# EAGLE board xio4 (EAGLE 9.4.2)
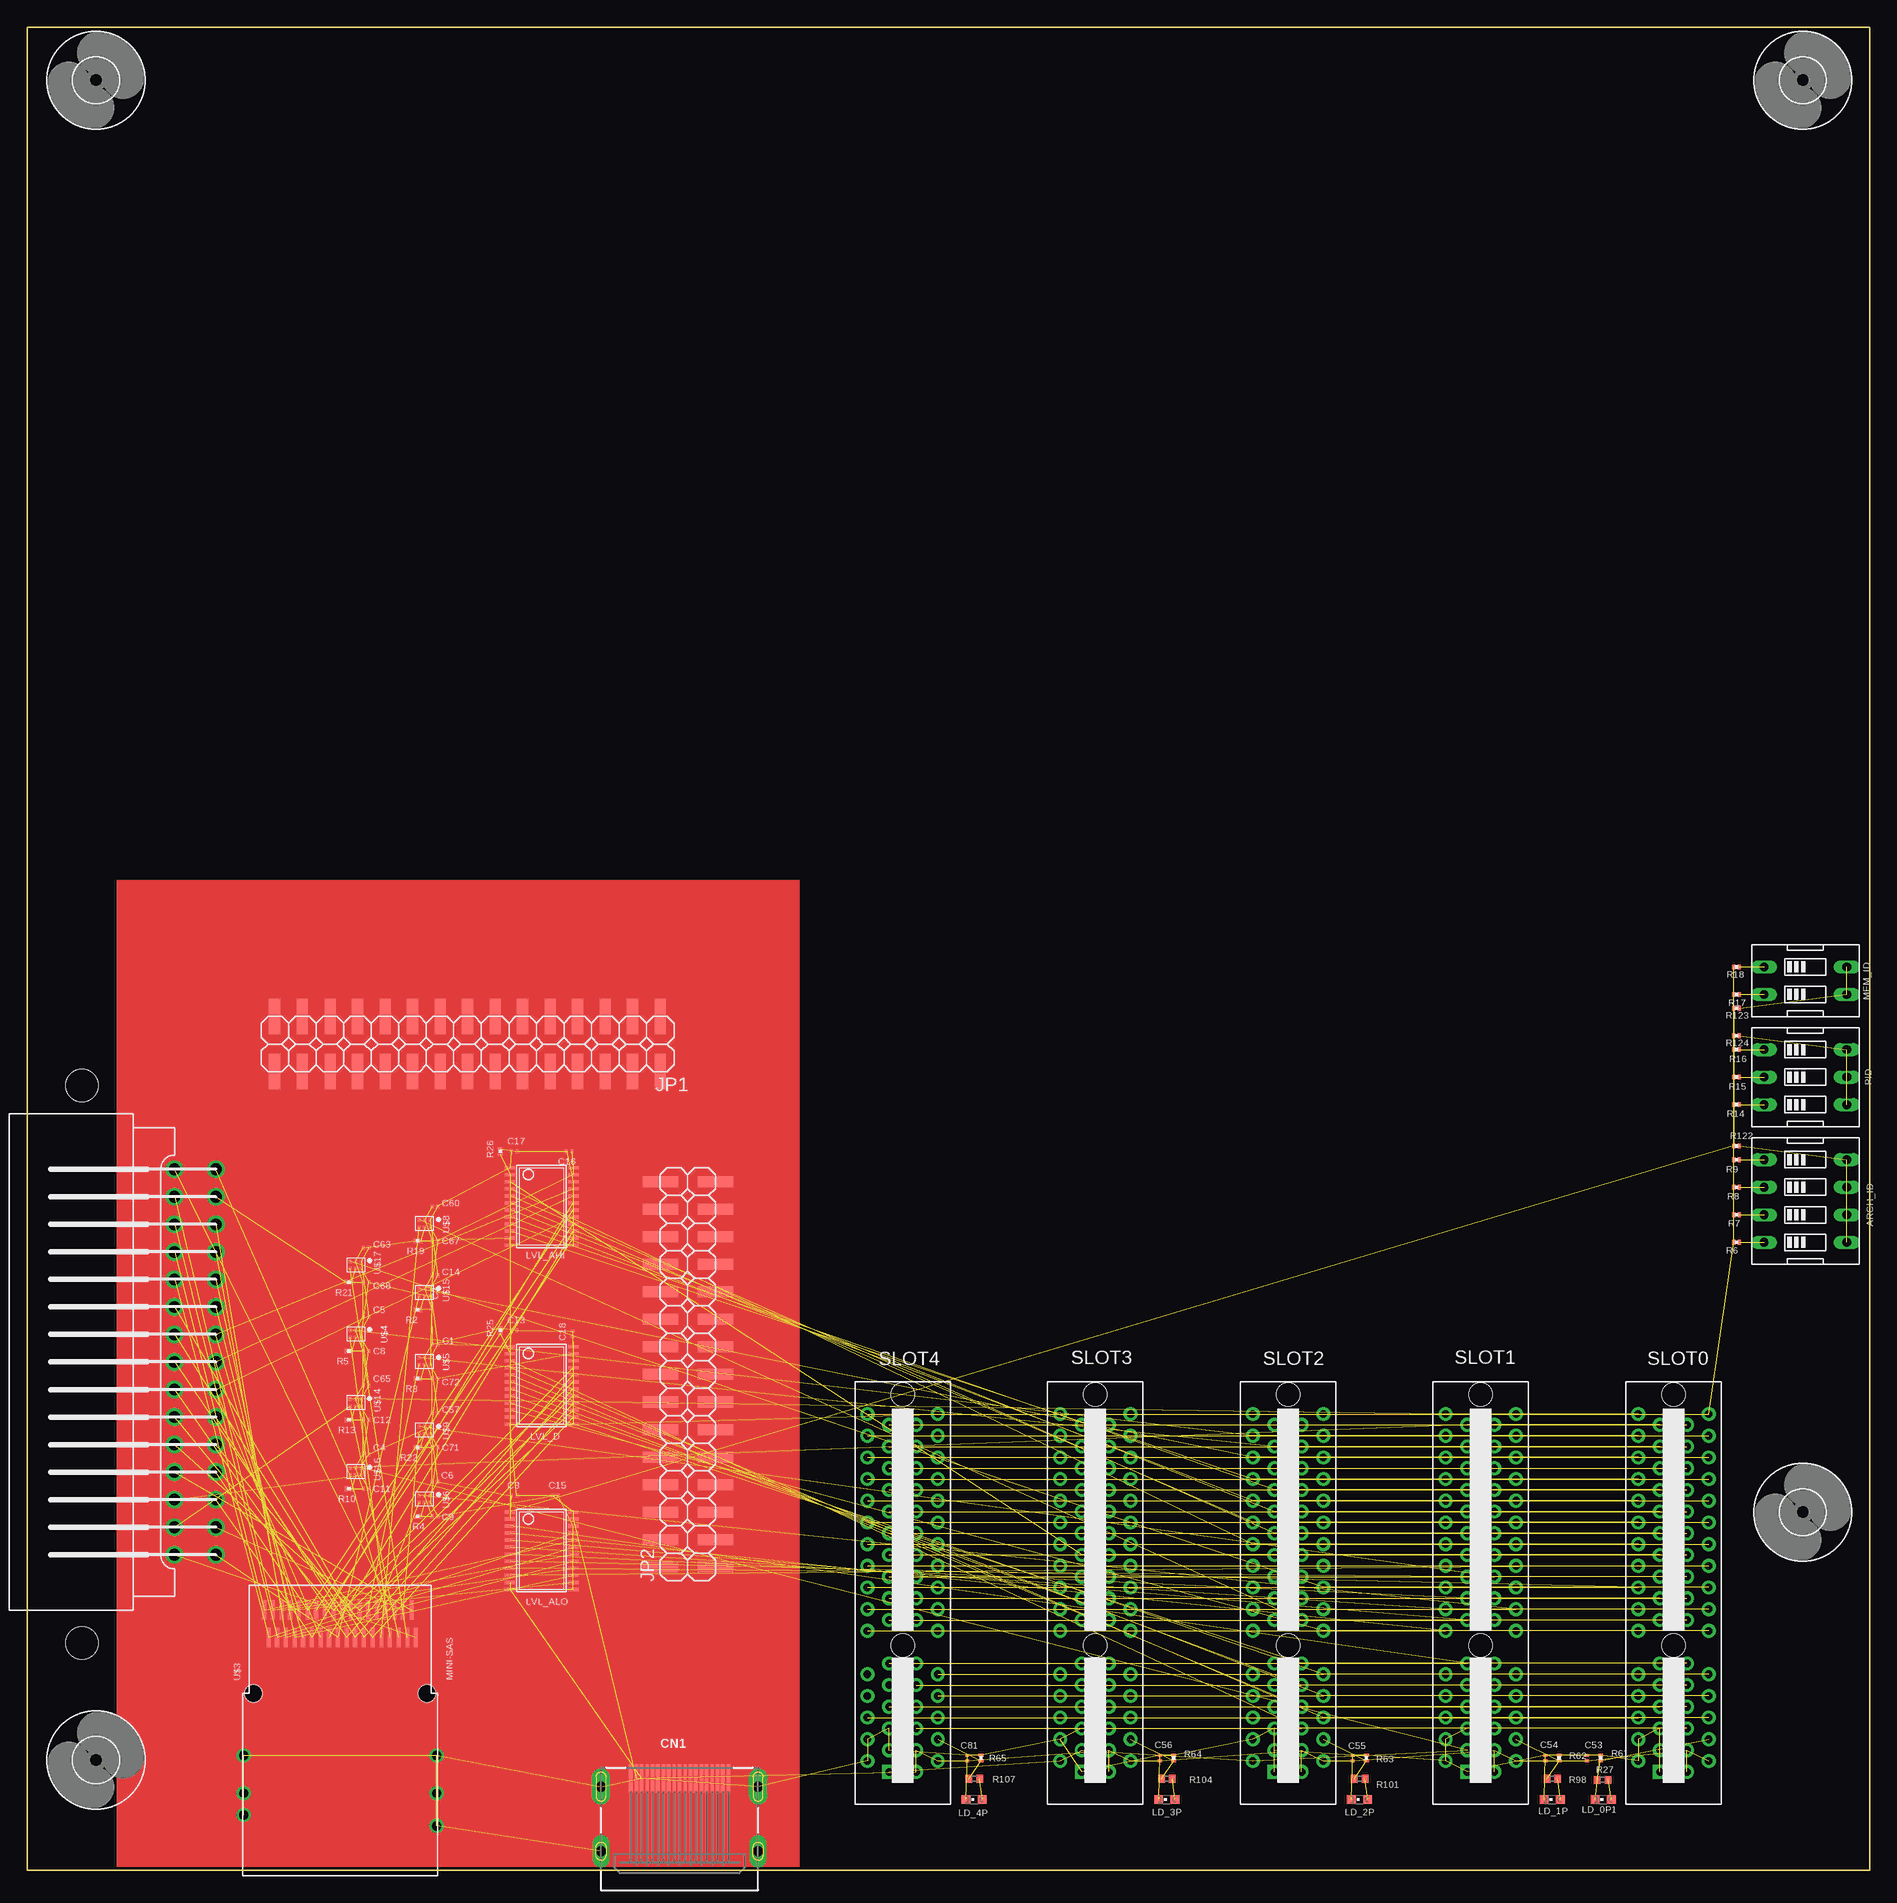
[diagram p0: board, top side]
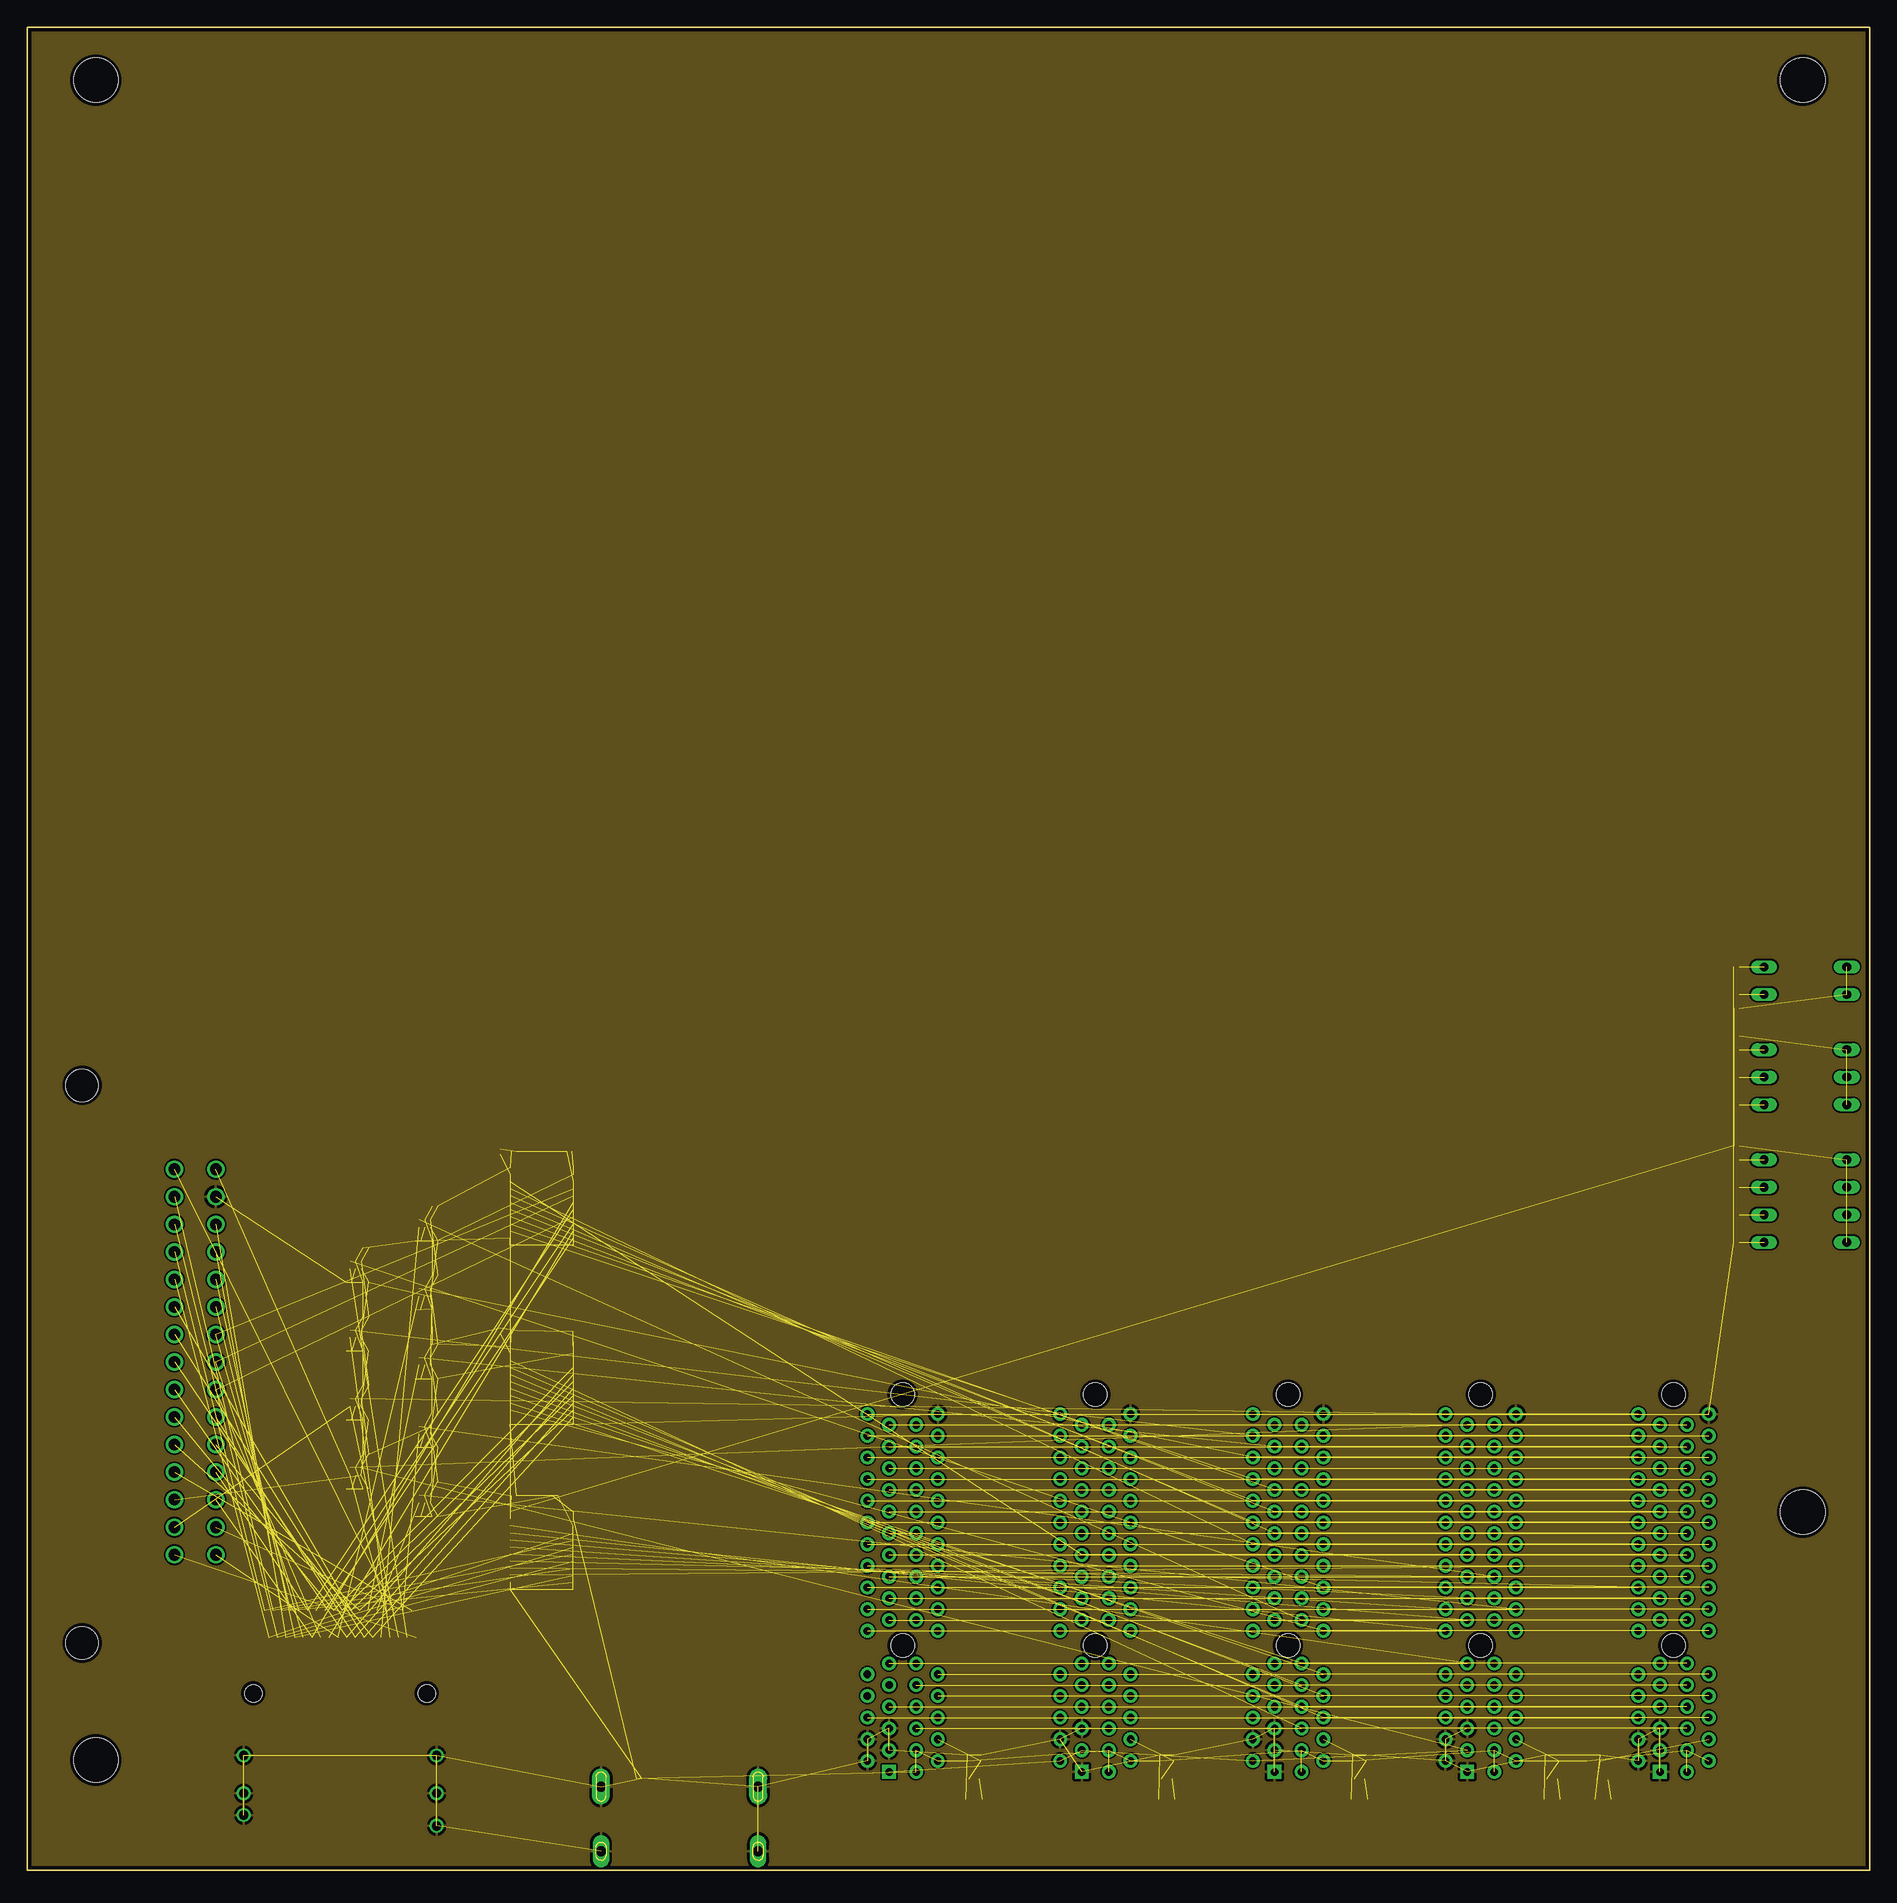
[diagram p1: board, inner layer Route15]

Size 170 x 170 mm. Coordinates in mm from the lower left corner, seen from the top.
Outline: 0,170 170,170 170,0 0,0 0,170
Copper layers (1+2*15+16): Top 0.035mm / dielectric 0.2mm / Route2 0.017mm / dielectric 1.2mm / Route15 0.017mm / dielectric 0.2mm / Bottom 0.035mm
Design rules "seed-4layer-6.6": minimum track width 6mil, minimum drill 0.3mm, track to track 6mil, track to pad 6mil, pad to pad 6mil, via to via 6mil, smd to smd 0mil, copper to edge 12mil, drill to drill 12mil, minimum pad ring 6mil, minimum via ring 5.5mil, stop-mask expansion 4mil, vias tented up to drill 25mil, thermal gap 10mil
Net classes: 1 Power: width 0.305 mm, drill 0.203 mm; 2 Slot-power: width 0.508 mm; 3 tx100: width 0.254 mm, clearance 0.457 mm; 4 usb90: width 0.254 mm, clearance 0.178 mm; 5 cclk50: width 0.203 mm; 6 3v3: width 0.254 mm; 7 vccint_aux: width 0.305 mm; 14 qspi: width 0.203 mm
Holes 3 mm at 5.08,20.95 5.08,72.39

## Footprints (pad centres in the part's own frame; a part is rotated, then mirrored left to right if it is on the bottom)
EDG-04 = drill 0.813 long: 1 -3.81,-3.81; 2 -1.27,-3.81; 3 1.27,-3.81; 4 3.81,-3.81; 5 3.81,3.81; 6 1.27,3.81; 7 -1.27,3.81; 8 -3.81,3.81
C0201 = smd 0.25 x 0.35: 1 -0.25,0; 2 0.25,0
A8_CART = drill 1.067: P1 -17.78,6.35; P2 -15.24,6.35; P3 -12.7,6.35; P4 -10.16,6.35; P5 -7.62,6.35; P6 -5.08,6.35; P7 -2.54,6.35; P8 0,6.35; P9 2.54,6.35; P10 5.08,6.35; P11 7.62,6.35; P12 10.16,6.35; P13 12.7,6.35; P14 15.24,6.35; P15 17.78,6.35; PA -17.78,10.16; PB -15.24,10.16; PC -12.7,10.16; PD -10.16,10.16; PE -7.62,10.16; PF -5.08,10.16; PH -2.54,10.16; PJ 0,10.16; PK 2.54,10.16; PL 5.08,10.16; PM 7.62,10.16; PN 10.16,10.16; PP 12.7,10.16; PR 15.24,10.16; PS 17.78,10.16
HDMI_MOLEX_47151-0001 = smd 0.3 x 2.6: 1 4.5,0; 2 4,0; 3 3.5,0; 4 3,0; 5 2.5,0; 6 2,0; 7 1.5,0; 8 1,0; 9 0.5,0; 10 0,0; 11 -0.5,0; 12 -1,0; 13 -1.5,0; 14 -2,0; 15 -2.5,0; 16 -3,0; 17 -3.5,0; 18 -4,0; 19 -4.5,0 | drill 0.9 pad 1.65 long: P$1 -7.25,-0.76; P$2 7.25,-0.76 | drill 0.9 pad 1.5 long: P$3 7.25,-6.72; P$4 -7.25,-6.72
4,1 = hole 4.1: 0,0
2X15SMD = smd 1.016 x 3.302: 1 -1.27,-3.81; 2 -1.27,1.27; 3 1.27,-3.81; 4 1.27,1.27; 5 3.81,-3.81; 6 3.81,1.27; 7 6.35,-3.81; 8 6.35,1.27; 9 8.89,-3.81; 10 8.89,1.27; 11 11.43,-3.81; 12 11.43,1.27; 13 13.97,-3.81; 14 13.97,1.27; 15 16.51,-3.81; 16 16.51,1.27; 17 19.05,-3.81; 18 19.05,1.27; 19 21.59,-3.81; 20 21.59,1.27; 21 24.13,-3.81; 22 24.13,1.27; 23 26.67,-3.81; 24 26.67,1.27; 25 29.21,-3.81; 26 29.21,1.27; 27 31.75,-3.81; 28 31.75,1.27; 29 34.29,-3.81; 30 34.29,1.27
CHIPLED_0603 = smd 0.8 x 0.8: A 0,-0.75; C 0,0.75
TSSOP24 = smd 0.305 x 0.991: 1 -3.575,-2.918; 2 -2.925,-2.918; 3 -2.275,-2.918; 4 -1.625,-2.918; 5 -0.975,-2.918; 6 -0.325,-2.918; 7 0.325,-2.918; 8 0.975,-2.918; 9 1.625,-2.918; 10 2.275,-2.918; 11 2.925,-2.918; 12 3.575,-2.918; 13 3.575,2.918; 14 2.925,2.918; 15 2.275,2.918; 16 1.625,2.918; 17 0.975,2.918; 18 0.325,2.918; 19 -0.325,2.918; 20 -0.975,2.918; 21 -1.625,2.918; 22 -2.275,2.918; 23 -2.925,2.918; 24 -3.575,2.918
EDG-02 = drill 0.813 long: 1 -1.27,-3.81; 2 1.27,-3.81; 3 1.27,3.81; 4 -1.27,3.81
EDG-03 = drill 0.813 long: 1 -2.54,-3.81; 2 0,-3.81; 3 2.54,-3.81; 4 2.54,3.81; 5 0,3.81; 6 -2.54,3.81
R0201 = smd 0.28 x 0.43: 1 -0.255,0; 2 0.255,0
R0402 = smd 0.6 x 0.7: 1 -0.5,0; 2 0.5,0
PCI-E_64 = drill 0.7 pad 1.27 square: A1 -12.06,1.5 | drill 0.7 pad 1.27: A2 -11.06,3.5; A3 -10.06,1.5; A4 -9.06,3.5; A5 -8.06,1.5; A6 -7.06,3.5; A7 -6.06,1.5; A8 -5.06,3.5; A9 -4.06,1.5; A10 -3.06,3.5; A11 -2.06,1.5; A12 0.94,3.5; A13 1.94,1.5; A14 2.94,3.5; A15 3.94,1.5; A16 4.94,3.5; A17 5.94,1.5; A18 6.94,3.5; A19 7.94,1.5; A20 8.94,3.5; A21 9.94,1.5; A22 10.94,3.5; A23 11.94,1.5; A24 12.94,3.5; A25 13.94,1.5; A26 14.94,3.5; A27 15.94,1.5; A28 16.94,3.5; A29 17.94,1.5; A30 18.94,3.5; A31 19.94,1.5; A32 20.94,3.5; B1 -12.06,-1; B2 -11.06,-3; B3 -10.06,-1; B4 -9.06,-3; B5 -8.06,-1; B6 -7.06,-3; B7 -6.06,-1; B8 -5.06,-3; B9 -4.06,-1; B10 -3.06,-3; B11 -2.06,-1; B12 0.94,-3; B13 1.94,-1; B14 2.94,-3; B15 3.94,-1; B16 4.94,-3; B17 5.94,-1; B18 6.94,-3; B19 7.94,-1; B20 8.94,-3; B21 9.94,-1; B22 10.94,-3; B23 11.94,-1; B24 12.94,-3; B25 13.94,-1; B26 14.94,-3; B27 15.94,-1; B28 16.94,-3; B29 17.94,-1; B30 18.94,-3; B31 19.94,-1; B32 20.94,-3 | hole 2.15: -0.41,0.25; 22.74,0.25
MINI-SAS = smd 0.35 x 1.8: PA1 -6.2,8.78; PA2 -5.4,8.78; PA3 -4.6,8.78; PA4 -3.8,8.78; PA5 -3,8.78; PA6 -2.2,8.78; PA7 -1.4,8.78; PA8 -0.6,8.78; PA9 0.2,8.78; PA10 1,8.78; PA11 1.8,8.78; PA12 2.6,8.78; PA13 3.4,8.78; PA14 4.2,8.78; PA15 5,8.78; PA16 5.8,8.78; PA17 6.6,8.78; PA18 7.4,8.78; PB1 -6.6,11.29; PB2 -5.8,11.29; PB3 -5,11.29; PB4 -4.2,11.29; PB5 -3.4,11.29; PB6 -2.6,11.29; PB7 -1.8,11.29; PB8 -1,11.29; PB9 -0.2,11.29; PB10 0.6,11.29; PB11 1.4,11.29; PB12 2.2,11.29; PB13 3,11.29; PB14 3.8,11.29; PB15 4.6,11.29; PB16 5.4,11.29; PB17 6.2,11.29; PB18 7,11.29 | drill 0.85: SHIELD1 -8.5,-2.12; SHIELD2 -8.5,-5.62; SHIELD3 -8.5,-7.62; SHIELD4 9.3,-2.12; SHIELD5 9.3,-5.62; SHIELD6 9.3,-8.62 | hole 1.6: -7.6,3.6; 8.4,3.6
SOT886 = smd 0.325 x 0.27: 1 -0.338,0.5; 2 -0.338,0; 3 -0.338,-0.5; 4 0.338,-0.5; 5 0.338,0; 6 0.338,0.5

## Placement (x,y rotation side)
ARCH_ID  209-4MS  [EDG-04]  164.07,61.72 270 top
C1  0.1uF  [C0201]  37.63,48.52 180 top
C2  0.1uF  [C0201]  37.31,52.01 270 top
C3  0.1uF  [C0201]  44.93,34.55 0 top
C4  0.1uF  [C0201]  31.28,38.36 180 top
C5  0.1uF  [C0201]  31.28,51.06 180 top
C6  0.1uF  [C0201]  37.63,35.82 180 top
C8  0.1uF  [C0201]  31.28,47.88 180 top
C9  0.1uF  [C0201]  37.63,32.65 180 top
C11  0.1uF  [C0201]  31.28,35.19 180 top
C12  0.1uF  [C0201]  31.28,41.53 180 top
C13  0.1uF  [C0201]  44.93,49.79 0 top
C14  0.1uF  [C0201]  37.63,54.87 180 top
C15  0.1uF  [C0201]  48.74,34.55 0 top
C16  0.1uF  [C0201]  50.01,66.3 180 top
C17  0.1uF  [C0201]  44.93,66.3 0 top
C18  0.1uF  [C0201]  50.33,49.47 90 top
C53  0.1uF  [C0201]  143.9,10.34 90 top
C54  0.1uF  [C0201]  140.09,10.34 90 top
C55  0.1uF  [C0201]  122.31,10.34 90 top
C56  0.1uF  [C0201]  104.53,10.34 90 top
C57  0.1uF  [C0201]  37.63,42.17 180 top
C60  0.1uF  [C0201]  37.63,61.22 180 top
C63  0.1uF  [C0201]  31.28,57.41 180 top
C65  0.1uF  [C0201]  31.28,44.71 180 top
C67  0.1uF  [C0201]  37.63,58.05 180 top
C68  0.1uF  [C0201]  31.28,54.23 180 top
C71  0.1uF  [C0201]  37.63,38.99 180 top
C72  0.1uF  [C0201]  37.63,45.34 180 top
C81  0.1uF  [C0201]  86.75,10.34 90 top
CARTRIDGE  5650118-1  [A8_CART]  7.25,46.87 270 top
CN1  [HDMI_MOLEX_47151-0001]  60.2,8.46 0 top
H3  MOUNT-HOLE4.1  [4,1]  6.35,10.16 0 top
H6  MOUNT-HOLE4.1  [4,1]  6.35,165.1 0 top
H7  MOUNT-HOLE4.1  [4,1]  163.83,165.1 0 top
H8  MOUNT-HOLE4.1  [4,1]  163.83,33.02 0 top
JP1  [2X15SMD]  57.15,74.93 180 top
JP2  [2X15SMD]  59.69,29.21 90 top
LD_0P1  SML-D12D1WT86  [CHIPLED_0603]  145.42,6.53 90 top
LD_1P  SML-D12D1WT86  [CHIPLED_0603]  140.72,6.53 90 top
LD_2P  SML-D12D1WT86  [CHIPLED_0603]  122.94,6.53 90 top
LD_3P  SML-D12D1WT86  [CHIPLED_0603]  105.16,6.53 90 top
LD_4P  SML-D12D1WT86  [CHIPLED_0603]  87.38,6.53 90 top
LVL_AHI  SN74LVC8T245  [TSSOP24]  47.47,61.22 270 top
LVL_ALO  SN74LVC8T245  [TSSOP24]  47.47,29.47 270 top
LVL_D  SN74LVC8T245  [TSSOP24]  47.47,44.71 270 top
MEM_ID  209-2MS  [EDG-02]  164.07,82.04 270 top
PID  209-3MS  [EDG-03]  164.07,73.15 270 top
R2  10K  [R0201]  36.04,51.7 180 top
R3  10K  [R0201]  36.04,45.34 180 top
R4  10K  [R0201]  36.04,32.65 180 top
R5  10K  [R0201]  29.69,47.88 180 top
R6  47K  [R0201]  157.72,57.91 180 top
R7  47K  [R0201]  157.72,60.45 180 top
R8  47K  [R0201]  157.72,62.99 180 top
R9  47K  [R0201]  157.72,65.53 180 top
R10  10K  [R0201]  29.69,35.19 180 top
R13  10K  [R0201]  29.69,41.53 180 top
R14  47K  [R0201]  157.72,70.61 180 top
R15  47K  [R0201]  157.72,73.15 180 top
R16  47K  [R0201]  157.72,75.69 180 top
R17  47K  [R0201]  157.72,80.77 180 top
R18  47K  [R0201]  157.72,83.31 180 top
R19  10K  [R0201]  36.04,58.05 180 top
R21  10K  [R0201]  29.69,54.23 180 top
R22  10K  [R0201]  36.04,38.99 180 top
R25  10K  [R0201]  43.66,49.79 90 top
R26  10K  [R0201]  43.66,66.3 90 top
R27  59R  [R0402]  145.37,8.33 0 top
R61  10K  [R0201]  145.16,10.34 270 top
R62  10K  [R0201]  141.35,10.34 270 top
R63  10K  [R0201]  123.58,10.34 270 top
R64  10K  [R0201]  105.8,10.34 270 top
R65  10K  [R0201]  88.02,10.34 270 top
R98  59R  [R0402]  140.72,8.43 0 top
R101  59R  [R0402]  122.94,8.43 0 top
R104  59R  [R0402]  105.16,8.43 0 top
R107  59R  [R0402]  87.38,8.43 0 top
R122  1K  [R0201]  157.72,66.8 0 top
R123  1K  [R0201]  157.72,79.5 0 top
R124  1K  [R0201]  157.72,76.96 0 top
SLOT0  PCIE_64  [PCI-E_64]  152.15,21.13 90 top
SLOT1  PCIE_64  [PCI-E_64]  134.37,21.13 90 top
SLOT2  PCIE_64  [PCI-E_64]  116.59,21.13 90 top
SLOT3  PCIE_64  [PCI-E_64]  98.81,21.13 90 top
SLOT4  PCIE_64  [PCI-E_64]  81.03,21.13 90 top
U$3  MINI-SAS  [MINI-SAS]  28.48,12.7 0 top
U$4  74LVC1T45GWSOT866  [SOT886]  30.32,49.47 270 top
U$5  74LVC1T45GWSOT866  [SOT886]  36.67,46.93 270 top
U$6  74LVC1T45GWSOT866  [SOT886]  36.67,34.23 270 top
U$8  74LVC1T45GWSOT866  [SOT886]  36.67,59.63 270 top
U$9  74LVC1T45GWSOT866  [SOT886]  36.67,40.58 270 top
U$14  74LVC1T45GWSOT866  [SOT886]  30.32,43.12 270 top
U$15  74LVC1T45GWSOT866  [SOT886]  36.67,53.28 270 top
U$16  74LVC1T45GWSOT866  [SOT886]  30.32,36.77 270 top
U$17  74LVC1T45GWSOT866  [SOT886]  30.32,55.82 270 top

## Library data of the parts
ARCH_ID = special; USE: 209-4MS
C1-C6 C8 C9 C11-C18 C53-C57 C60 C63 C65 C67 C68 C71 C72 C81 = rcl; SPICEPREFIX: C; USE: GRM033C71C104KE14D
CARTRIDGE = sjg-con; USE: 5650118-1
CN1 = microbuilder; USE: 047150001
H3 H6-H8 = holes
JP1 JP2 = pinhead-2
LD_0P1 LD_1P LD_2P LD_3P LD_4P = led; USE: SML-D12D1WT86
LVL_AHI LVL_ALO LVL_D = sjg-logic; USE: SN74LVC8T245PWR
MEM_ID = special; USE: 209-2MS
PID = special; USE: 209-3MS
R2-R5 R10 R13 R19 R21 R22 R25 R26 R61-R65 = rcl; SPICEPREFIX: R; USE: ERJ-1GNJ103C
R6-R9 R14-R18 = rcl; SPICEPREFIX: R; USE: RMCF0201JT47K0
R27 R98 R101 R104 R107 = rcl; SPICEPREFIX: R; USE: RMCF0402FT59R0
R122-R124 = rcl; SPICEPREFIX: R; USE: RC0201JR-071KL
SLOT0 SLOT1-SLOT4 = pcie; USE: 10018783-10201TLF
U$3 = sjg-con; USE: 1888019-4
U$4-U$6 U$8 U$9 U$14-U$17 = sjg-logic; USE: 74LVCH1T45GS,132

## Nets
!HI_CCTL!: CARTRIDGE.P15 U$3.PA18
!HI_EXTSEL!: U$3.PB13 U$5.4
!HI_HALT!: U$3.PA14 U$8.4
!HI_IRQ!: U$3.PB14 U$6.4
!HI_MPD!: U$3.PA15 U$4.4
!HI_RST!: U$3.PA17 U$17.4
!HI_S4!: CARTRIDGE.P1 U$3.PB16
!HI_S5!: CARTRIDGE.P12 U$3.PB18
!LO_CCTL!: SLOT0.A27 SLOT1.A27 SLOT2.A27 SLOT3.A27 SLOT4.A27
!LO_EXTSEL!: SLOT0.A29 SLOT1.A29 SLOT2.A29 SLOT3.A29 SLOT4.A29 U$5.3
!LO_HALT!: SLOT0.B13 SLOT1.B13 SLOT2.B13 SLOT3.B13 SLOT4.B13 U$8.3
!LO_IRQ!: SLOT0.B14 SLOT1.B14 SLOT2.B14 SLOT3.B14 SLOT4.B14 U$6.3
!LO_MPD!: SLOT0.A30 SLOT1.A30 SLOT2.A30 SLOT3.A30 SLOT4.A30 U$4.3
!LO_REF!: SLOT0.B15 SLOT1.B15 SLOT2.B15 SLOT3.B15 SLOT4.B15
!LO_RST!: SLOT0.B16 SLOT1.B16 SLOT2.B16 SLOT3.B16 SLOT4.B16 U$17.3
+3V3 [lcd]: C1.1 C3.1 C4.1 C5.1 C6.1 C13.1 C14.1 C17.1 C57.1 C60.1 C63.1 C65.1 LVL_AHI.1 LVL_ALO.1 LVL_D.1 R122.1 R123.1 R124.1 SLOT1.A3 SLOT2.A2 SLOT3.A2 SLOT3.A3 SLOT4.A1 U$4.1 U$5.1 U$6.1 U$8.1 U$9.1 U$14.1 U$15.1 U$16.1 U$17.1
+5V [Power]: C2.1 C8.1 C9.1 C11.1 C12.1 C15.1 C16.1 C18.1 C53.1 C54.1 C55.1 C56.1 C67.1 C68.1 C71.1 C72.1 C81.1 CARTRIDGE.P13 CN1.18 LVL_AHI.23 LVL_AHI.24 LVL_ALO.23 LVL_ALO.24 LVL_D.23 LVL_D.24 SLOT0.B1 SLOT0.B2 SLOT0.B3 SLOT1.B1 SLOT1.B2 SLOT1.B3 SLOT2.B1 SLOT2.B2 SLOT2.B3 SLOT3.B1 SLOT3.B2 SLOT3.B3 SLOT4.B1 SLOT4.B2 SLOT4.B3 U$4.6 U$5.6 U$6.6 U$8.6 U$9.6 U$14.6 U$15.6 U$16.6 U$17.6
ARCH0: ARCH_ID.1 R9.1
ARCH1: ARCH_ID.2 R8.1
ARCH2: ARCH_ID.3 R7.1
ARCH3: ARCH_ID.4 R6.1
DIR_A: LVL_AHI.2 LVL_ALO.2 R26.1
DIR_CLK: R2.1 U$15.5
DIR_D: LVL_D.2 R25.1
DIR_EXTSEL: R3.1 U$5.5
DIR_HALT: R19.1 U$8.5
DIR_IRQ: R4.1 U$6.5
DIR_MPD: R5.1 U$4.5
DIR_RD4: R10.1 U$16.5
DIR_RD5: R13.1 U$14.5
DIR_RST: R21.1 U$17.5
DIR_RW: R22.1 U$9.5
GND: C1.2 C2.2 C3.2 C4.2 C5.2 C6.2 C8.2 C9.2 C11.2 C12.2 C13.2 C14.2 C15.2 C16.2 C17.2 C18.2 C53.2 C54.2 C55.2 C56.2 C57.2 C60.2 C63.2 C65.2 C67.2 C68.2 C71.2 C72.2 C81.2 CARTRIDGE.PB CN1.17 CN1.P$1 CN1.P$2 CN1.P$3 CN1.P$4 LD_0P1.C LD_1P.C LD_2P.C LD_3P.C LD_4P.C LVL_AHI.11 LVL_AHI.12 LVL_AHI.13 LVL_AHI.22 LVL_ALO.11 LVL_ALO.12 LVL_ALO.13 LVL_ALO.22 LVL_D.11 LVL_D.12 LVL_D.13 LVL_D.22 R2.2 R3.2 R4.2 R5.2 R6.2 R7.2 R8.2 R9.2 R10.2 R13.2 R14.2 R15.2 R16.2 R17.2 R18.2 R19.2 R21.2 R22.2 R25.2 R26.2 R61.1 R62.1 R63.1 R64.1 R65.1 SLOT0.A1 SLOT0.A2 SLOT0.A3 SLOT0.A4 SLOT0.A5 SLOT0.B32 SLOT1.A1 SLOT1.A2 SLOT1.A4 SLOT1.A5 SLOT1.B32 SLOT2.A1 SLOT2.A3 SLOT2.A4 SLOT2.A5 SLOT2.B32 SLOT3.A1 SLOT3.A4 SLOT3.A5 SLOT3.B32 SLOT4.A2 SLOT4.A3 SLOT4.A4 SLOT4.A5 SLOT4.B32 U$3.SHIELD1 U$3.SHIELD2 U$3.SHIELD3 U$3.SHIELD4 U$3.SHIELD5 U$3.SHIELD6 U$4.2 U$5.2 U$6.2 U$8.2 U$9.2 U$14.2 U$15.2 U$16.2 U$17.2
HBUS0: SLOT0.B18 SLOT1.B18 SLOT2.B18 SLOT3.B18 SLOT4.B18
HBUS1: SLOT0.B19 SLOT1.B19 SLOT2.B19 SLOT3.B19 SLOT4.B19
HBUS2: SLOT0.B20 SLOT1.B20 SLOT2.B20 SLOT3.B20 SLOT4.B20
HBUS3: SLOT0.B21 SLOT1.B21 SLOT2.B21 SLOT3.B21 SLOT4.B21
HBUS4: SLOT0.B22 SLOT1.B22 SLOT2.B22 SLOT3.B22 SLOT4.B22
HBUS5: SLOT0.B23 SLOT1.B23 SLOT2.B23 SLOT3.B23 SLOT4.B23
HBUS6: SLOT0.B24 SLOT1.B24 SLOT2.B24 SLOT3.B24 SLOT4.B24
HBUS7: SLOT0.B25 SLOT1.B25 SLOT2.B25 SLOT3.B25 SLOT4.B25
HBUS8: SLOT0.B26 SLOT1.B26 SLOT2.B26 SLOT3.B26 SLOT4.B26
HBUS9: SLOT0.B27 SLOT1.B27 SLOT2.B27 SLOT3.B27 SLOT4.B27
HBUS10: SLOT0.B28 SLOT1.B28 SLOT2.B28 SLOT3.B28 SLOT4.B28
HBUS11: SLOT0.B29 SLOT1.B29 SLOT2.B29 SLOT3.B29 SLOT4.B29
HBUS12: SLOT0.B30 SLOT1.B30 SLOT2.B30 SLOT3.B30 SLOT4.B30
HBUS13: SLOT0.B31 SLOT1.B31 SLOT2.B31 SLOT3.B31 SLOT4.B31
HI_A0: CARTRIDGE.P5 LVL_ALO.21 U$3.PA1
HI_A1: CARTRIDGE.P4 LVL_ALO.20 U$3.PB1
HI_A2: CARTRIDGE.P3 LVL_ALO.19 U$3.PA2
HI_A3: CARTRIDGE.P2 LVL_ALO.18 U$3.PB2
HI_A4: CARTRIDGE.PC LVL_ALO.17 U$3.PA3
HI_A5: CARTRIDGE.PD LVL_ALO.16 U$3.PB3
HI_A6: CARTRIDGE.PE LVL_ALO.15 U$3.PA4
HI_A7: CARTRIDGE.PF LVL_ALO.14 U$3.PB4
HI_A8: CARTRIDGE.PH LVL_AHI.21 U$3.PA5
HI_A9: CARTRIDGE.PJ LVL_AHI.20 U$3.PB5
HI_A10: CARTRIDGE.PP LVL_AHI.19 U$3.PA6
HI_A11: CARTRIDGE.PN LVL_AHI.18 U$3.PB6
HI_A12: CARTRIDGE.PK LVL_AHI.17 U$3.PA7
HI_A13: LVL_AHI.16 U$3.PB7
HI_A14: LVL_AHI.15 U$3.PA8
HI_A15: LVL_AHI.14 U$3.PB8
HI_CLK: CARTRIDGE.PS U$3.PA9 U$15.4
HI_D0: CARTRIDGE.P10 LVL_D.21 U$3.PB9
HI_D1: CARTRIDGE.P9 LVL_D.20 U$3.PA10
HI_D2: CARTRIDGE.P8 LVL_D.19 U$3.PB10
HI_D3: CARTRIDGE.PL LVL_D.18 U$3.PA11
HI_D4: CARTRIDGE.P6 LVL_D.17 U$3.PB11
HI_D5: CARTRIDGE.P7 LVL_D.16 U$3.PA12
HI_D6: CARTRIDGE.P11 LVL_D.15 U$3.PB12
HI_D7: CARTRIDGE.PM LVL_D.14 U$3.PA13
HI_R/!W!: CARTRIDGE.PR U$3.PB17 U$9.4
HI_RD4: CARTRIDGE.PA U$3.PB15 U$16.4
HI_RD5: CARTRIDGE.P14 U$3.PA16 U$14.4
LO_A0: LVL_ALO.3 SLOT0.A11 SLOT1.A11 SLOT2.A11 SLOT3.A11 SLOT4.A11
LO_A1: LVL_ALO.4 SLOT0.A12 SLOT1.A12 SLOT2.A12 SLOT3.A12 SLOT4.A12
LO_A2: LVL_ALO.5 SLOT0.A13 SLOT1.A13 SLOT2.A13 SLOT3.A13 SLOT4.A13
LO_A3: LVL_ALO.6 SLOT0.A14 SLOT1.A14 SLOT2.A14 SLOT3.A14 SLOT4.A14
LO_A4: LVL_ALO.7 SLOT0.A15 SLOT1.A15 SLOT2.A15 SLOT3.A15 SLOT4.A15
LO_A5: LVL_ALO.8 SLOT0.A16 SLOT1.A16 SLOT2.A16 SLOT3.A16 SLOT4.A16
LO_A6: LVL_ALO.9 SLOT0.A17 SLOT1.A17 SLOT2.A17 SLOT3.A17 SLOT4.A17
LO_A7: LVL_ALO.10 SLOT0.A18 SLOT1.A18 SLOT2.A18 SLOT3.A18 SLOT4.A18
LO_A8: LVL_AHI.3 SLOT0.A19 SLOT1.A19 SLOT2.A19 SLOT3.A19 SLOT4.A19
LO_A9: LVL_AHI.4 SLOT0.A20 SLOT1.A20 SLOT2.A20 SLOT3.A20 SLOT4.A20
LO_A10: LVL_AHI.5 SLOT0.A21 SLOT1.A21 SLOT2.A21 SLOT3.A21 SLOT4.A21
LO_A11: LVL_AHI.6 SLOT0.A22 SLOT1.A22 SLOT2.A22 SLOT3.A22 SLOT4.A22
LO_A12: LVL_AHI.7 SLOT0.A23 SLOT1.A23 SLOT2.A23 SLOT3.A23 SLOT4.A23
LO_A13: LVL_AHI.8 SLOT0.A24 SLOT1.A24 SLOT2.A24 SLOT3.A24 SLOT4.A24
LO_A14: LVL_AHI.9 SLOT0.A25 SLOT1.A25 SLOT2.A25 SLOT3.A25 SLOT4.A25
LO_A15: LVL_AHI.10 SLOT0.A26 SLOT1.A26 SLOT2.A26 SLOT3.A26 SLOT4.A26
LO_CLK: SLOT0.A28 SLOT1.A28 SLOT2.A28 SLOT3.A28 SLOT4.A28 U$15.3
LO_D0: LVL_D.3 SLOT0.B5 SLOT1.B5 SLOT2.B5 SLOT3.B5 SLOT4.B5
LO_D1: LVL_D.4 SLOT0.B6 SLOT1.B6 SLOT2.B6 SLOT3.B6 SLOT4.B6
LO_D2: LVL_D.5 SLOT0.B7 SLOT1.B7 SLOT2.B7 SLOT3.B7 SLOT4.B7
LO_D3: LVL_D.6 SLOT0.B8 SLOT1.B8 SLOT2.B8 SLOT3.B8 SLOT4.B8
LO_D4: LVL_D.7 SLOT0.B9 SLOT1.B9 SLOT2.B9 SLOT3.B9 SLOT4.B9
LO_D5: LVL_D.8 SLOT0.B10 SLOT1.B10 SLOT2.B10 SLOT3.B10 SLOT4.B10
LO_D6: LVL_D.9 SLOT0.B11 SLOT1.B11 SLOT2.B11 SLOT3.B11 SLOT4.B11
LO_D7: LVL_D.10 SLOT0.B12 SLOT1.B12 SLOT2.B12 SLOT3.B12 SLOT4.B12
LO_R/!W!: SLOT0.B17 SLOT1.B17 SLOT2.B17 SLOT3.B17 SLOT4.B17 U$9.3
LO_RD4: SLOT0.A31 SLOT1.A31 SLOT2.A31 SLOT3.A31 SLOT4.A31 U$16.3
LO_RD5: SLOT0.A32 SLOT1.A32 SLOT2.A32 SLOT3.A32 SLOT4.A32 U$14.3
MEM0: MEM_ID.1 R18.1
MEM1: MEM_ID.2 R17.1
N$1: LD_0P1.A R27.2
N$11 [lcd]: ARCH_ID.5 ARCH_ID.6 ARCH_ID.7 ARCH_ID.8 R122.2
N$48 [lcd]: MEM_ID.3 MEM_ID.4 R123.2
N$49 [lcd]: PID.4 PID.5 PID.6 R124.2
N$91: LD_1P.A R98.2
N$94: LD_2P.A R101.2
N$97: LD_3P.A R104.2
N$101: LD_4P.A R107.2
PID0: PID.1 R16.1
PID1: PID.2 R15.1
PID2: PID.3 R14.1
S0_PRESENT: R27.1 R61.2 SLOT0.B4
S1_PRESENT: R62.2 R98.1 SLOT1.B4
S2_PRESENT: R63.2 R101.1 SLOT2.B4
S3_PRESENT: R64.2 R104.1 SLOT3.B4
S4_PRESENT: R65.2 R107.1 SLOT4.B4
SPI0_IRQ: SLOT0.A8
SPI0_MOSI: SLOT0.A9
SPI1_IRQ: SLOT1.A8
SPI1_MISO: SLOT1.A10
SPI1_MOSI: SLOT1.A9
SPI2_IRQ: SLOT2.A8
SPI2_MISO: SLOT2.A10
SPI2_MOSI: SLOT2.A9
SPI3_IRQ: SLOT3.A8
SPI3_MISO: SLOT3.A10
SPI3_MOSI: SLOT3.A9
SPI4_IRQ: SLOT4.A8
SPI4_MISO: SLOT4.A10
SPI4_MOSI: SLOT4.A9
SPIO_MISO: SLOT0.A10
TX0_SHIELD: CN1.8
TX1_SHIELD: CN1.5
TX2_SHIELD: CN1.2
TXC_SHIELD: CN1.11
VALID_RD: SLOT0.A7 SLOT1.A7 SLOT2.A7 SLOT3.A7 SLOT4.A7
VALID_WR: SLOT0.A6 SLOT1.A6 SLOT2.A6 SLOT3.A6 SLOT4.A6

## Tracks (layer width: path | path; a pad name or v marks a point on that pad's centre or on a via)
!HI_CCTL!  (1 unrouted)
!HI_EXTSEL!  (1 unrouted)
!HI_HALT!  (1 unrouted)
!HI_IRQ!  (1 unrouted)
!HI_MPD!  (1 unrouted)
!HI_RST!  (1 unrouted)
!HI_S4!  (1 unrouted)
!HI_S5!  (1 unrouted)
!LO_CCTL!  (4 unrouted)
!LO_EXTSEL!  (5 unrouted)
!LO_HALT!  (5 unrouted)
!LO_IRQ!  (5 unrouted)
!LO_MPD!  (5 unrouted)
!LO_REF!  (4 unrouted)
!LO_RST!  (5 unrouted)
+3V3  (31 unrouted)
+5V  (48 unrouted)
ARCH0  (1 unrouted)
ARCH1  (1 unrouted)
ARCH2  (1 unrouted)
ARCH3  (1 unrouted)
DIR_A  (2 unrouted)
DIR_CLK  (1 unrouted)
DIR_D  (1 unrouted)
DIR_EXTSEL  (1 unrouted)
DIR_HALT  (1 unrouted)
DIR_IRQ  (1 unrouted)
DIR_MPD  (1 unrouted)
DIR_RD4  (1 unrouted)
DIR_RD5  (1 unrouted)
DIR_RST  (1 unrouted)
DIR_RW  (1 unrouted)
GND  (116 unrouted)
  pour Route15: -2.54,172.72 172.72,172.72 172.72,-2.54 -2.54,-2.54
HBUS0  (4 unrouted)
HBUS1  (4 unrouted)
HBUS2  (4 unrouted)
HBUS3  (4 unrouted)
HBUS4  (4 unrouted)
HBUS5  (4 unrouted)
HBUS6  (4 unrouted)
HBUS7  (4 unrouted)
HBUS8  (4 unrouted)
HBUS9  (4 unrouted)
HBUS10  (4 unrouted)
HBUS11  (4 unrouted)
HBUS12  (4 unrouted)
HBUS13  (4 unrouted)
HI_A0  (2 unrouted)
HI_A1  (2 unrouted)
HI_A2  (2 unrouted)
HI_A3  (2 unrouted)
HI_A4  (2 unrouted)
HI_A5  (2 unrouted)
HI_A6  (2 unrouted)
HI_A7  (2 unrouted)
HI_A8  (2 unrouted)
HI_A9  (2 unrouted)
HI_A10  (2 unrouted)
HI_A11  (2 unrouted)
HI_A12  (2 unrouted)
HI_A13  (1 unrouted)
HI_A14  (1 unrouted)
HI_A15  (1 unrouted)
HI_CLK  (2 unrouted)
HI_D0  (2 unrouted)
HI_D1  (2 unrouted)
HI_D2  (2 unrouted)
HI_D3  (2 unrouted)
HI_D4  (2 unrouted)
HI_D5  (2 unrouted)
HI_D6  (2 unrouted)
HI_D7  (2 unrouted)
HI_R/!W!  (2 unrouted)
HI_RD4  (2 unrouted)
HI_RD5  (2 unrouted)
LO_A0  (5 unrouted)
LO_A1  (5 unrouted)
LO_A2  (5 unrouted)
LO_A3  (5 unrouted)
LO_A4  (5 unrouted)
LO_A5  (5 unrouted)
LO_A6  (5 unrouted)
LO_A7  (5 unrouted)
LO_A8  (5 unrouted)
LO_A9  (5 unrouted)
LO_A10  (5 unrouted)
LO_A11  (5 unrouted)
LO_A12  (5 unrouted)
LO_A13  (5 unrouted)
LO_A14  (5 unrouted)
LO_A15  (5 unrouted)
LO_CLK  (5 unrouted)
LO_D0  (5 unrouted)
LO_D1  (5 unrouted)
LO_D2  (5 unrouted)
LO_D3  (5 unrouted)
LO_D4  (5 unrouted)
LO_D5  (5 unrouted)
LO_D6  (5 unrouted)
LO_D7  (5 unrouted)
LO_R/!W!  (5 unrouted)
LO_RD4  (5 unrouted)
LO_RD5  (5 unrouted)
MEM0  (1 unrouted)
MEM1  (1 unrouted)
N$1  (1 unrouted)
N$11  (4 unrouted)
N$48  (2 unrouted)
N$49  (3 unrouted)
N$91  (1 unrouted)
N$94  (1 unrouted)
N$97  (1 unrouted)
N$101  (1 unrouted)
PID0  (1 unrouted)
PID1  (1 unrouted)
PID2  (1 unrouted)
S0_PRESENT  (2 unrouted)
S1_PRESENT  (2 unrouted)
S2_PRESENT  (2 unrouted)
S3_PRESENT  (2 unrouted)
S4_PRESENT  (2 unrouted)
VALID_RD  (4 unrouted)
VALID_WR  (4 unrouted)
(copper drawn outside any net)
  shapes: Top area x1

## Text on the board
tNames: Xio -3- / © 2019 SjG | Top board - Zturn Lite / Middle - B2B, Cartridge, SAS & HDMI underneath / Base - PCIe x5, Dips / All SMT parts are 1206
Document: 1 : Signal / 2 : GND / 3 : Signal / 14 : +5v / signal / 15 : +3.3v / 16 : Signal
dxf: Silkscreen needs work / Space for version label